# Altium PCB L5_Interface_V2.0.PcbDoc
Units mm, origin at the board's own origin, x right, y up, seen from the top; angles counter-clockwise.
Board outline 96.26 x 58.26 mm, 2 copper layers (Top Layer, Bottom Layer); 50 components, 37 nets, 239 pads, 140 vias.
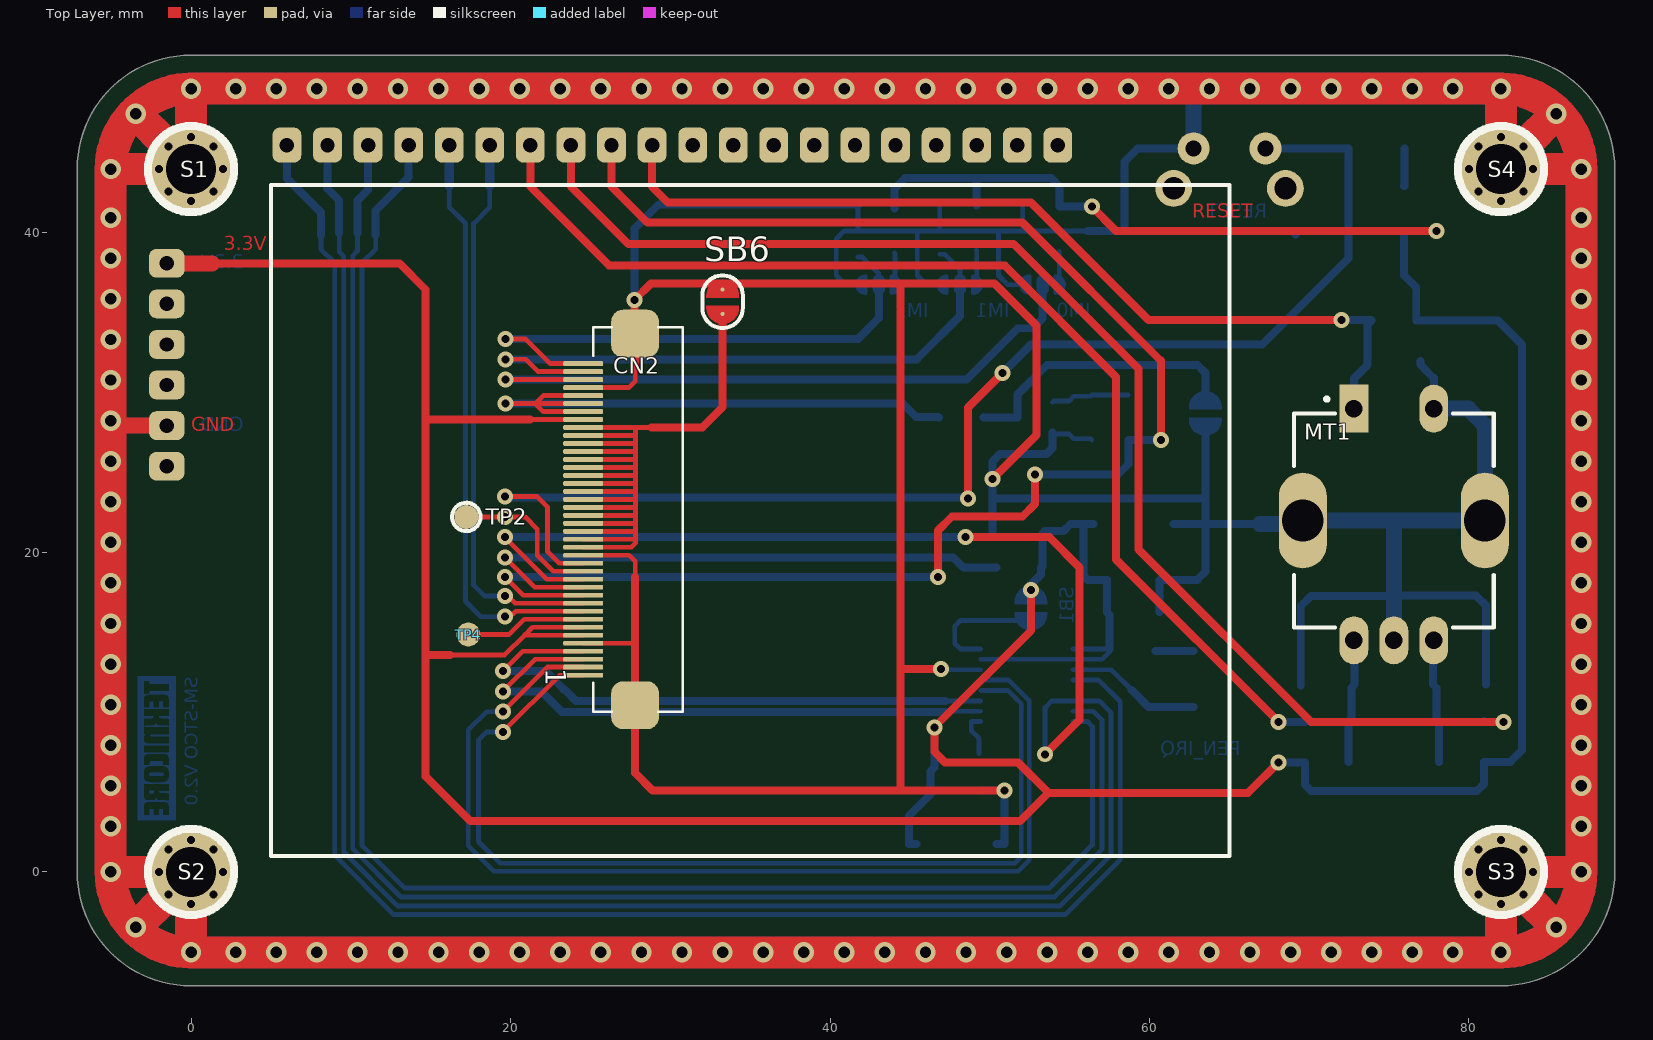
[diagram p0: Top Layer view]
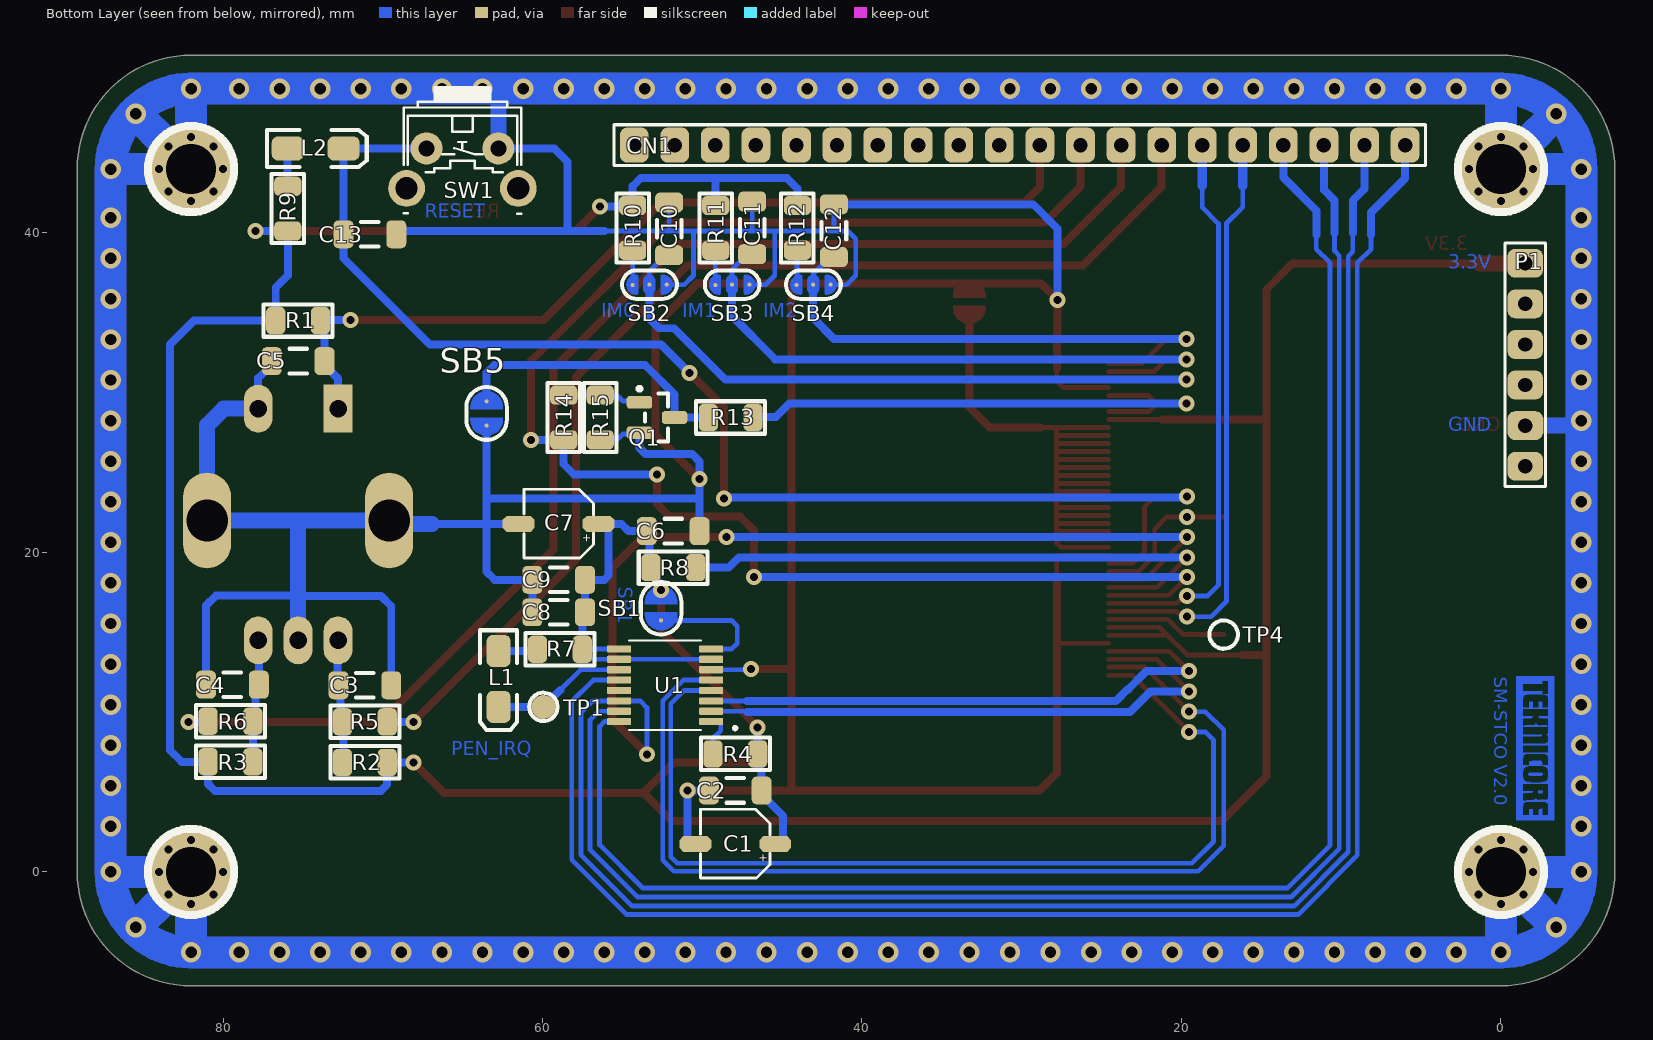
[diagram p1: Bottom Layer view, seen from below]

## Layer stack, top to bottom
Top Solder: solder mask 0.0102, Solder Resist, Dk 3.5
Top Layer: signal copper 0.0356
Dielectric 1: dielectric 0.32, FR-4, Dk 4.8
Bottom Layer: signal copper 0.0356
Bottom Solder: solder mask 0.0102, Solder Resist, Dk 3.5

## Board outline
0,-7.131 cw(c0,0) -7.131,0 -7.131,44 cw(c0,44) 0,51.131 82,51.131 cw(c82,44) 89.131,44 89.131,0 cw(c82,0) 82,-7.131

## Design rules (kind name [scope] priority, off if disabled: settings)
Clearance Clearance_1 [All] p1: gap=0.2 ignorepadtopadclearanceinfootprint=FALSE
Clearance [All] p2: gap=0.2 ignorepadtopadclearanceinfootprint=FALSE
PolygonConnect [All] p1: connectstyle=Relief reliefconductorwidth=0.254 reliefentries=4 polygonreliefangle="90 Angle" airgapwidth=0.254
RoutingVias [All] p1: holewidth=0.711 width=1.27 viastyle="Through Hole" minholewidth=0.5 minwidth=0 maxholewidth=0.711 maxwidth=1.27
SolderMaskExpansion [All] p1: expansion=0.102 istentingtop=FALSE
SupplyNets "Schematic Supply Nets_1" [InNet('+3.3')] p1: voltage=0.000
SupplyNets "Schematic Supply Nets" [InNet('GND')] p2: voltage=0.000
UnConnectedPin [All] p1:
Width [All] p1: maxlimit=5 minlimit=0.2 preferedwidth=0.3
30 further rules are at their usual default settings.

## Components (designator, comment, footprint, x,y, rotation, side; value= is the part's Value field where it differs from the comment)
C1 "10uF/25V" CAP_EL_B 48.273,1.549 r270 bottom
C2 "100nF" CAP1206 47.93,5.105 r180 bottom
C3 "10nF" CAP1206 71.12,11.684 r0 bottom
C4 "10nF" CAP1206 79.413,11.722 r180 bottom
C5 "10nF" CAP1206 75.3,31.979 r180 bottom
C6 "100nF" CAP1206 51.816,21.336 r0 bottom
C7 "10uF/25V" CAP_EL_B 59.33,21.59 r270 bottom
C8 "100nF" CAP1206 58.987,16.256 r180 bottom
C9 "100nF" CAP1206 58.987,18.288 r180 bottom
C10 "100nF" CAP1206 52.07,40.259 r270 bottom
C11 "100nF" CAP1206 46.871,40.321 r270 bottom
C12 "100nF" CAP1206 41.758,40.145 r270 bottom
C13 "100nF" CAP1206 70.806,39.919 r0 bottom
CN1 "Header Male 1x20" "HDR_M_1x20PIN_0.2\"" 30.13,45.5 r0 bottom
CN2 "TFT Display 2.4 inch" "FPC_CONNECTOR HIROSE_FH12A-40S-0.5SH(55)" 26.174,22.067 r270 top
L1 "RED" "LED 1206" 62.749,12.081 r270 bottom
L2 "Red" "LED 1206" 74.203,45.29 r180 bottom
MT1 "PEC11R_Rotary Encoder" "PEC11R_Rotary Encoder" 75.3,22 r0 top
P1 "Header Male 1x6" "HDR_M_1X6PIN_0.2\"" -1.524,38.1 r270 bottom
Q1 "SS8050" SOT23_M 52.832,28.448 r180 bottom
R1 "10K" Resistor_SMD_1206 75.3,34.519 r0 bottom
R2 "10K" Resistor_SMD_1206 71.12,6.858 r180 bottom
R3 "10K" Resistor_SMD_1206 79.537,6.896 r0 bottom
R4 "10R" Resistor_SMD_1206 47.93,7.391 r180 bottom
R5 "0R" Resistor_SMD_1206 71.12,9.398 r0 bottom
R6 "0R" Resistor_SMD_1206 79.537,9.436 r180 bottom
R7 "82R" Resistor_SMD_1206 58.912,13.941 r180 bottom
R8 "10K" Resistor_SMD_1206 51.816,19.05 r0 bottom
R9 "82R" Resistor_SMD_1206 75.946,41.526 r270 bottom
R10 "10K" Resistor_SMD_1206 54.356,40.321 r90 bottom
R11 "10K" Resistor_SMD_1206 49.157,40.321 r90 bottom
R12 "10K" Resistor_SMD_1206 44.044,40.321 r90 bottom
R13 "47R" Resistor_SMD_1206 48.218,28.448 r180 bottom
R14 "1K" Resistor_SMD_1206 58.674,28.448 r270 bottom
R15 "10K" Resistor_SMD_1206 56.388,28.448 r90 bottom
S1 "Screw" "SCREW 3MM-INVIRONS 0.254MM" 0,44 r0 top
S2 "Screw" "SCREW 3MM-INVIRONS 0.254MM" 0,0 r0 top
S3 "Screw" "SCREW 3MM-INVIRONS 0.254MM" 82,0 r0 top
S4 "Screw" "SCREW 3MM-INVIRONS 0.254MM" 82,44 r0 top
SB1 "Solder Bridge" "SolderBridge_NC (100x80)(20)mil"#1 52.578,16.51 r270 bottom
SB2 "Solder Bridge" "SOLDERBRIDGE_SMALL_NC_3PIN (70X50)(20)MIL"#1 53.315,36.765 r0 bottom
SB3 "Solder Bridge" "SOLDERBRIDGE_SMALL_NC_3PIN (70X50)(20)MIL"#2 48.141,36.765 r0 bottom
SB4 "Solder Bridge" "SOLDERBRIDGE_SMALL_NC_3PIN (70X50)(20)MIL"#3 43.053,36.765 r0 bottom
SB5 "Solder Bridge" "SolderBridge_NC (100x80)(20)mil"#1 63.5,28.702 r90 bottom
SB6 "Solder Bridge" "SolderBridge_NC (100x80)(20)mil"#2 33.274,35.698 r270 top
SW1 "Push Button" SW_PushBotton_Right 65.012,45.29 r0 bottom
TP1 "Test Point" TestPoint_SMD_Circle_1.5mm#1 59.944,10.331 r180 bottom
TP2 "Test Point" TestPoint_SMD_Circle_1.5mm#1 17.23,22.225 r0 top
TP4 "Test Point" TestPoint_SMD_Circle_1.5mm#2 17.357,14.859 r180 bottom
U1 "HR2046" TSSOP16 52.324,11.684 r0 bottom

## Footprints (in the part's own frame and the unit in brackets; to place one, negate y for a bottom-side part, rotate by r counter-clockwise, add the part's x,y. Pads: shape width x height; smd on the part's side, far side on the other; paste and mask are expansions set on the pad)
CAP1206 [mm] "Chip Capacitor, 2-Leads, Body 3/20x1/60mm, IPC Medium Density DESIGNER:ABBAS BASEREH"
  rrect50% 1.25x1.75 smd: 1(-1.651,0) 2(1.651,0)
  silkscreen extent -0.55,-0.77 0.55,0.77, body extent -1.65,-0.85 1.65,0.85, height 0.94
CAP_EL_B [mm] "83x83mm"
  oct 1x2 smd: 1(-0.203,2.845) 2(-0.203,-2.159)
  silkscreen extent -2.37,-1.83 1.93,2.51, body extent -2.35,-1.98 1.95,2.62, height 5.4
"FPC_CONNECTOR HIROSE_FH12A-40S-0.5SH(55)" [mm]
  rrect50% 0.3x2.5 smd: 1(9.754,-1.626) 2(9.246,-1.626) 3(8.746,-1.626) 4(8.246,-1.626) 5(7.746,-1.626) 6(7.246,-1.626) 7(6.746,-1.626) 8(6.246,-1.626) 9(5.746,-1.626) 10(5.246,-1.626) 11(4.746,-1.626) 12(4.246,-1.626) 13(3.746,-1.626) 14(3.246,-1.626) 15(2.746,-1.626) 16(2.246,-1.626) 17(1.746,-1.626) 18(1.246,-1.626) 19(0.746,-1.626) 20(0.246,-1.626) 21(-0.254,-1.626) 22(-0.754,-1.626) 23(-1.254,-1.626) 24(-1.754,-1.626) 25(-2.254,-1.626) 26(-2.754,-1.626) 27(-3.254,-1.626) 28(-3.754,-1.626) 29(-4.254,-1.626) 30(-4.754,-1.626) 31(-5.254,-1.626) 32(-5.754,-1.626) 33(-6.254,-1.626) 34(-6.754,-1.626) 35(-7.254,-1.626) 36(-7.754,-1.626) 37(-8.254,-1.626) 38(-8.754,-1.626) 39(-9.254,-1.626) 40(-9.754,-1.626)
  rrect50% 3x3 smd: 41(-11.633,1.626) 42(11.633,1.626)
  silkscreen extent -12.04,-0.99 12.04,4.6, body extent -12.25,-1.75 12.25,5.25, height 2.03
"HDR_M_1X6PIN_0.2\"" [mm] "6 row, straight, gold plating"
  rrect50% 1.8x2.2 hole 0.9: 1(0,0) 2(2.54,0) 3(5.08,0) 4(7.62,0) 5(10.16,0) 6(12.7,0)
  silkscreen extent -1.27,-1.27 13.97,1.27, body extent -1.28,-1.38 13.96,1.54, height 8.61
"HDR_M_1x20PIN_0.2\"" [mm] "2.00 mm THT Pin Header, 20p"
  rrect50% 1.8x2.2 hole 0.9: 1(-24.13,0) 2(-21.59,0) 3(-19.05,0) 4(-16.51,0) 5(-13.97,0) 6(-11.43,0) 7(-8.89,0) 8(-6.35,0) 9(-3.81,0) 10(-1.27,0) 11(1.27,0) 12(3.81,0) 13(6.35,0) 14(8.89,0) 15(11.43,0) 16(13.97,0) 17(16.51,0) 18(19.05,0) 19(21.59,0) 20(24.13,0)
  silkscreen extent -25.4,-1.27 25.4,1.27, body extent -25.39,-1.27 25.4,1.26, height 8.51
"LED 1206" [mm]
  rrect50% 2x1.5 smd: A(-1.75,0) K(1.75,0)
  silkscreen extent -3.05,-1.15 3.2,1.15, body extent -1.65,-0.72 1.65,0.73, height 1.36
"PEC11R_Rotary Encoder" [mm]
  oval 1.8x3 hole 1.1: 1(-2.5,-7.5) 2(0,-7.5) 3(2.5,-7.5) 5(2.5,7)
  rect 1.8x3 hole 1.1: 4(-2.5,7)
  oval 3x6 hole 2.6: S1(-5.7,0) S2(5.7,0)
  silkscreen extent -6.25,-6.7 6.25,7.7, body extent -6.92,-7.6 6.92,7.1, height 21
Resistor_SMD_1206 [mm]
  rrect50% 1.2x1.7 smd: 1(-1.4,0) 2(1.4,0)
  silkscreen extent -2.16,-1.02 2.16,1.02, body extent -1.52,-0.76 1.52,0.76, height 0.6
"SCREW 3MM-INVIRONS 0.254MM" [mm]
  round 0.5 hole 0.5: S(-2,0) S(-1.414,-1.414) S(-1.414,1.414) S(0,-2) S(0,2) S(1.414,-1.414) S(1.414,1.414) S(2,0)
  round 5 hole 3.15 mask+0.1: S(0,0)
  silkscreen extent -2.7,-2.7 2.7,2.7, body extent -2.8,-2.8 2.8,2.8, height 2.58
"SolderBridge_NC (100x80)(20)mil"#1 [mil]
  round 10 smd: 1(-30,0) 2(30,0)
  round 81 on Bottom Solder mask+0: 5(-15,0) 6(15,0)
  Top Layer region: 10,-40 15,-40 30.31,-36.96 43.28,-28.28 51.96,-15.31 55,0 55,0 51.96,15.31 43.28,28.28 30.31,36.96 15,40 15,40 10,40
  Top Layer region: -10,40 -15,40 -30.31,36.96 -43.28,28.28 -51.96,15.31 -55,0 -55,0 -51.96,-15.31 -43.28,-28.28 -30.31,-36.96 -15,-40 -15,-40 -10,-40
  silkscreen extent -65,-50 65,50
"SolderBridge_NC (100x80)(20)mil"#2 [mil]
  round 10 smd: 1(-30,0) 2(30,0)
  round 81 on Top Solder mask+0: 5(-15,0) 6(15,0)
  Top Layer region: -10,40 -15,40 -30.31,36.96 -43.28,28.28 -51.96,15.31 -55,0 -55,0 -51.96,-15.31 -43.28,-28.28 -30.31,-36.96 -15,-40 -15,-40 -10,-40
  Top Layer region: 10,-40 15,-40 30.31,-36.96 43.28,-28.28 51.96,-15.31 55,0 55,0 51.96,15.31 43.28,28.28 30.31,36.96 15,40 15,40 10,40
  silkscreen extent -65,-50 65,50
"SOLDERBRIDGE_SMALL_NC_3PIN (70X50)(20)MIL"#1 [mil]
  round 10 smd mask+0: 1(-43,0) 2(0,0) 3(41,1)
  round 51 on Bottom Solder mask+0: 3(-33,0) 4(0,0) 4(32,0)
  Top Layer region: 32,20 39.65,18.48 46.14,14.14 50.48,7.65 52,0 52,0 50.48,-7.65 46.14,-14.14 39.65,-18.48 32,-20 32,-20
  Top Layer region: -33,20 -40.65,18.48 -47.14,14.14 -51.48,7.65 -53,0 -53,0 -51.48,-7.65 -47.14,-14.14 -40.65,-18.48 -33,-20 -33,-20
  Top Layer region: -10.02,20.08 -2.37,18.56 4.12,14.22 8.45,7.74 9.98,0.08 9.98,0.08 8.45,-7.57 4.12,-14.06 -2.37,-18.4 -10.02,-19.92 -10.02,-19.92
  Top Layer lines w10: -53,0 cw(c-33,0) -52.78,2.96 cw(c-33,0) -33,20 -33,0 -33,-20 cw(c-33,0) -53,0 ; -10.02,10.16 cw(c0,10.16) 0,20.19 cw(c0,10.16) 10.02,10.16 10.02,0 10.02,-10 cw(c0,-10) 0,-20.02 cw(c0,-10) -10.02,-10 -10.02,0 -10.02,10.16 ; 32,20 cw(c32,0) 41,-17.86 cw(c32,0) 32,-20 32,1 32,20
  silkscreen extent -68,-35 67,35
"SOLDERBRIDGE_SMALL_NC_3PIN (70X50)(20)MIL"#2 [mil]
  round 10 smd mask+0: 1(-43,0) 2(0,0) 3(41,1)
  round 51 on Bottom Solder mask+0: 3(-33,0) 4(0,0) 4(32,0)
  Top Layer region: 32,20 39.65,18.48 46.14,14.14 50.48,7.65 52,0 52,0 50.48,-7.65 46.14,-14.14 39.65,-18.48 32,-20 32,-20
  Top Layer region: -33,20 -40.65,18.48 -47.14,14.14 -51.48,7.65 -53,0 -53,0 -51.48,-7.65 -47.14,-14.14 -40.65,-18.48 -33,-20 -33,-20
  Top Layer region: -10.02,20.08 -2.37,18.56 4.12,14.22 8.45,7.74 9.98,0.08 9.98,0.08 8.45,-7.57 4.12,-14.06 -2.37,-18.4 -10.02,-19.92 -10.02,-19.92
  Top Layer lines w10: -53,0 cw(c-33,0) -33,20 -33,0 -33,-20 cw(c-33,0) -53,0 ; -10.02,10.16 cw(c0,10.16) 0,20.19 cw(c0,10.16) 10.02,10.16 10.02,0 10.02,-10 cw(c0,-10) 0,-20.02 cw(c0,-10) -10.02,-10 -10.02,0 -10.02,10.16 ; 32,20 cw(c32,0) 41,-17.86 cw(c32,0) 32,-20 32,1 32,20
  silkscreen extent -68,-35 67,35
"SOLDERBRIDGE_SMALL_NC_3PIN (70X50)(20)MIL"#3 [mil]
  round 10 smd mask+0: 1(-43,0) 2(0,0) 3(41,1)
  round 51 on Bottom Solder mask+0: 3(-33,0) 4(0,0) 4(32,0)
  Top Layer region: 32,20 39.65,18.48 46.14,14.14 50.48,7.65 52,0 52,0 50.48,-7.65 46.14,-14.14 39.65,-18.48 32,-20 32,-20
  Top Layer region: -33,20 -40.65,18.48 -47.14,14.14 -51.48,7.65 -53,0 -53,0 -51.48,-7.65 -47.14,-14.14 -40.65,-18.48 -33,-20 -33,-20
  Top Layer region: -10.02,20.08 -2.37,18.56 4.12,14.22 8.45,7.74 9.98,0.08 9.98,0.08 8.45,-7.57 4.12,-14.06 -2.37,-18.4 -10.02,-19.92 -10.02,-19.92
  Top Layer lines w10: -53,0 ccw(c-33,0) -52.84,-2.54 ccw(c-33,0) -33,-20 -33,0 -33,20 ccw(c-33,0) -53,0 ; -10.02,10.16 cw(c0,10.16) -1,20.14 cw(c0,10.16) 0,20.19 cw(c0,10.16) 10.02,10.16 10.02,0 10.02,-10 cw(c0,-10) 0,-20.02 cw(c0,-10) -1,-19.97 cw(c0,-10) -10.02,-10 -10.02,0 -10.02,10.16 ; 32,20 cw(c32,0) 41,-17.86 cw(c32,0) 32,-20 32,1 32,20
  silkscreen extent -68,-35 67,35
SOT23_M [mm] "SOT23, 3-Leads, Body 2.9x1.3mm, Pitch 0.95mm, Lead Span 2.3mm, IPC Low Density"
  rrect50% 1.6x0.8 smd: 1(-1.1,0.95) 2(-1.1,-0.95) 3(1.1,0)
  silkscreen extent -1.23,-1.5 0.7,1.92, body extent -1.27,-1.5 1.27,1.5, height 1.1
SW_PushBotton_Right [mm] "Horizontal 6.0mm Square Type (Snap-in) SKHH Series; Stem length 3.85 mm ; 1,000,000 cycles ; 0.98N Force"
  round 2 hole 1.016: 1(-2.25,0) 2(2.25,0)
  round 2.3 hole 1.397: MH(-3.5,2.5) MH(3.5,2.5)
  silkscreen extent -3.68,-3.85 3.68,4.09, body extent -4.25,-3.86 4.25,4.04, height 7.43
TestPoint_SMD_Circle_1.5mm#1 [mm]
  round 1.5 smd: 1(0,0)
  silkscreen extent -0.89,-0.89 0.89,0.89
TestPoint_SMD_Circle_1.5mm#2 [mm]
  round 1.5 smd far side: 1(0,0)
  silkscreen extent -0.89,-0.89 0.89,0.89
TSSOP16 [mm]
  rrect25% 1.5x0.45 smd: 1(-2.885,2.275) 2(-2.885,1.625) 3(-2.885,0.975) 4(-2.885,0.325) 5(-2.885,-0.325) 6(-2.885,-0.975) 7(-2.885,-1.625) 8(-2.885,-2.275) 9(2.885,-2.275) 10(2.885,-1.625) 11(2.885,-0.975) 12(2.885,-0.325) 13(2.885,0.325) 14(2.885,0.975) 15(2.885,1.625) 16(2.885,2.275)
  silkscreen extent -4.48,-2.8 2.25,2.8, body extent -3.2,-2.5 3.2,2.5, height 1.1

## Part data
C1 C7: library part "Capacitor Electorolytic", "Capacitor Electorolytic"
C2 C3 C4 C5 C6 C8 C9 C10 C11 C12 C13: library part "Capacitor Poliester & Ceramic", "Capacitor Poliester & Ceramic"
CN2: "TFT Display 2.4 inch SPI TFT LCD color screen ILI9341 driver"
L1 L2: library part LED, "LED"
MT1: "Incremental Encoder, 12 Mm, Contact Rating 10 Ma - 5 Vdc", Package=None, Availability=Unavailable, MP=PEC11R-4215F-S0024, Price=None
Q1: "SS8050-G (NPN)"
R1 R2 R3 R4 R5 R6 R7 R8 R9 R10 R11 R12 R13 R14 R15: library part Resistor, "Resistor"
SB1 SB5 SB6: library part "Solder Bridge Short (NC)", "Solder Bridge Jumper"
SB2 SB3 SB4: library part "Solder Bridge Short 3Pin (NC)", "Solder Bridge Jumper"
SW1: library part "Push Button 4PIN Right", "Push Button 4PIN Right"
TP1 TP2 TP4: library part TestPoint
U1: library part XPT2046, "driver IC XPT2046 touch screen controller components"

## Free pads (board coordinates)
  round 1.5 on Mech1: 28(0,44) 29(0,0) 30(82,0) 31(82,44) 32(-1.524,38.1) 32(-1.524,38.1) 32(1.27,38.1) 32(1.27,38.1) 32(6.02,42.697) 32(6.02,42.697) 33(6,45.5) 33(6,45.5)

## Via types
v1: diameter 1.27, hole 0.711, Top Layer to Bottom Layer, 106 vias
v2: diameter 1, hole 0.5, Top Layer to Bottom Layer, 34 vias

## Nets (pads, with @x,y where several pads share a name; then routed paths per layer and width w, separated by ;. In a path a pad name is that pad's centre, name@x,y a point inside that pad or via, vN(x,y) a via of type N, cw(c..) or ccw(c..) an arc to the next point about the centre after c; other vN are vias at no path point)
+3.3: C1.1 C2.2 C6.2 C7.1 C8.2 C9.2 CN2.6 CN2.7 CN2.33 P1.1 R1.2 R2.2 R3.2 R4.2 R7.2 R8.2 R9.2 R10.2 R11.2 R12.2 SB1.1 U1.7 U1.9 U1.10 | length 282.3
  Top Layer w0.3: 16.214,13.589 19.643,13.589 20.913,14.859 ; 21.209,28.32 CN2.33 ; CN2.6 20.952,14.82 20.913,14.859 ; CN2.7 21.374,15.32 20.913,14.859
  Top Layer w0.5: 1.304,38.1 13.039,38.1 14.69,36.449 14.69,28.448 ; 16.214,13.589 14.69,13.589 ; 21.209,28.32 14.818,28.32 14.69,28.448 ; v2(52.578,17.653) 52.578,15.099 v2(46.53,9.051) 46.53,7.53 47.202,6.858 51.774,6.858 53.679,4.953 ; v2(56.388,41.656) 57.912,40.132 v2(77.978,40.132) ; v2(68.072,6.858) 66.167,4.953 53.679,4.953 ; 14.69,13.589 14.69,5.969 17.484,3.175 51.901,3.175 53.679,4.953 ; 14.69,13.589 14.69,28.448
  Top Layer w1: P1.1 1.304,38.1
  Bottom Layer w0.3: U1.7 U1.10 57.049,13.309 57.512,13.773 R7.2 ; U1.9 R7.2@57.257,13.959
  Bottom Layer w0.5: R12.2@44.044,41.545 R12.2 44.044,42.774 44.704,43.434 49.022,43.434 ; C1.1 44.933,1.753 44.933,3.509 46.279,4.855 C2.2 46.279,6.29 46.53,6.541 R4.2 v2(46.53,9.051) ; R11.2 49.157,43.299 49.022,43.434 ; v2(52.578,17.653) 52.578,17.988 53.216,18.626 R8.2 ; R8.2@53.296,19.13 53.296,21.165 C6.2 54.61,21.336 55.067,21.793 55.626,21.793 C7.1@55.88,21.793 ; v2(56.388,41.656) 56.385,41.659 54.356,41.659 R10.2 54.356,42.926 53.848,43.434 49.022,43.434 ; C7.1 C7.1@55.88,21.793 ; R7.2@57.496,13.941 57.496,16.097 C8.2 C9.2 56.134,18.288 55.88,18.542 C7.1@55.88,21.793 ; v2(68.072,6.858) R2.2 69.72,5.464 70.104,5.08 80.518,5.08 80.937,5.499 R3.2 82.588,6.896 83.312,7.62 83.312,33.02 81.813,34.519 R1.2 76.7,36.584 75.946,37.338 R9.2 77.972,40.126 v2(77.978,40.132)
BL_CTR: CN1.9 CN2.11 R14.2 | length 100.1
  Top Layer w0.3: v2(19.643,18.472) 20.795,17.32 CN2.11
  Top Layer w0.5: CN1.9 26.32,42.895 28.562,40.653 52.057,40.653 60.706,32.004 v2(60.706,27.051) ; v2(46.764,18.472) 46.764,21.375 47.625,22.236 52.039,22.236 52.832,23.029 v2(52.832,24.892)
  Bottom Layer w0.5: v2(19.643,18.472) v2(46.764,18.472) ; v2(52.832,24.892) 58.039,24.892 58.674,25.527 R14.2 58.677,27.051 v2(60.706,27.051)
GND: C1.2 C2.1 C3.1 C4.1 C5.1 C6.1 C7.2 C8.1 C9.1 C10.1 C11.1 C12.1 C13.1 CN2.5 CN2.16 CN2.37 CN2.41 CN2.42 MT1.2 MT1.5 MT1.S1 MT1.S2 P1.5 Q1.2 R15.1 S1.S S2.S S3.S S4.S SB2.1 SB3.1 SB4.1 SB5.1 SB6.1 SW1.1 U1.6 | length 1044
  Top Layer w0.3: CN2.5 27.767,14.32 ; CN2.16 27.432,19.82 27.8,19.452 27.8,18.472 ; CN2.37 27.389,30.32 27.8,30.732 27.8,31.52
  Top Layer w0.5: 27.8,18.472 CN2.42 27.8,6.194 28.889,5.105 44.408,5.105 ; 27.8,31.52 CN2.41 27.771,33.729 v2(27.771,35.814) 28.798,36.841 44.368,36.841 ; v2(46.948,12.7) 44.419,12.7 44.408,12.711 ; v2(50.165,24.594) 52.917,27.346 52.917,34.216 50.292,36.841 44.368,36.841 ; v2(50.927,5.105) 44.408,5.105 ; 44.368,36.841 44.408,36.801 44.408,12.711 ; 44.408,5.105 44.408,12.711
  Top Layer w1: v1@-5.033,27.9 -4.993,27.94 P1.5 ; 62.762,49.033 62.762,49.5
  Top Layer w2: v1(-3.461,-3.461) -1.414,-1.414 S2.S@0,0 ; v1(-3.461,47.461) -1.414,45.414 S1.S@0,44 ; v1(85.461,-3.461) 83.414,-1.414 S3.S@82,0 ; v1(85.461,47.461) 83.414,45.414 S4.S@82,44 ; v1(-5.033,0) ccw(c0,0) v1(0,-5.033) ; v1(-5.033,0) -2,0 S2.S@0,0 ; v1(-5.033,0) v1(-5.033,2.852) v1(-5.033,5.392) v1(-5.033,7.932) v1(-5.033,10.472) v1(-5.033,13.012) v1(-5.033,15.552) v1(-5.033,18.092) v1(-5.033,20.632) v1(-5.033,23.172) v1(-5.033,25.712) -5.033,27.9 v1(-5.033,28.252) v1(-5.033,30.792) v1(-5.033,33.332) v1(-5.033,35.872) v1(-5.033,38.412) v1(-5.033,40.952) v1(-5.033,44) ; v1(-5.033,44) cw(c0,44) v1(0,49.033) ; v1(-5.033,44) cw(c0,44) v1(0,49.033) ; v1(-5.033,44) -2,44 S1.S@0,44 ; v1(0,-5.033) v1(2.794,-5.033) v1(5.334,-5.033) v1(7.874,-5.033) v1(10.414,-5.033) v1(12.954,-5.033) v1(15.494,-5.033) v1(18.034,-5.033) v1(20.574,-5.033) v1(23.114,-5.033) v1(25.654,-5.033) v1(28.194,-5.033) v1(30.734,-5.033) v1(33.274,-5.033) v1(35.814,-5.033) v1(38.354,-5.033) v1(40.894,-5.033) v1(43.434,-5.033) v1(45.974,-5.033) v1(48.514,-5.033) v1(51.054,-5.033) v1(53.594,-5.033) v1(56.134,-5.033) v1(58.674,-5.033) v1(61.214,-5.033) v1(63.754,-5.033) v1(66.294,-5.033) v1(68.834,-5.033) v1(71.374,-5.033) v1(73.914,-5.033) v1(76.454,-5.033) v1(78.994,-5.033) v1(82,-5.033) ; v1(0,-5.033) 0,-2 S2.S@0,0 ; S1.S@0,44 0,46 v1(0,49.033) ; v1(0,49.033) v1(2.794,49.033) v1(5.334,49.033) v1(7.874,49.033) v1(10.414,49.033) v1(12.954,49.033) v1(15.494,49.033) v1(18.034,49.033) v1(20.574,49.033) v1(23.114,49.033) v1(25.654,49.033) v1(28.194,49.033) v1(30.734,49.033) v1(33.274,49.033) v1(35.814,49.033) v1(38.354,49.033) v1(40.894,49.033) v1(43.434,49.033) v1(45.974,49.033) v1(48.514,49.033) v1(51.054,49.033) v1(53.594,49.033) v1(56.134,49.033) v1(58.674,49.033) v1(61.214,49.033) 62.762,49.033 v1(63.754,49.033) v1(66.294,49.033) v1(68.834,49.033) v1(71.374,49.033) v1(73.914,49.033) v1(76.454,49.033) v1(78.994,49.033) v1(82,49.033) ; v1(82,-5.033) ccw(c82,0) v1(87.033,0) ; v1(82,-5.033) ccw(c82,0) v1(87.033,0) ; v1(82,-5.033) 82,-2 S3.S@82,0 ; S3.S@82,0 84,0 v1(87.033,0) ; S4.S@82,44 82,46 v1(82,49.033) ; S4.S@82,44 84,44 v1(87.033,44) ; v1(82,49.033) cw(c82,44) v1(87.033,44) ; v1(82,49.033) cw(c82,44) v1(87.033,44) ; v1(87.033,0) v1(87.033,2.852) v1(87.033,5.392) v1(87.033,7.932) v1(87.033,10.472) v1(87.033,13.012) v1(87.033,15.552) v1(87.033,18.092) v1(87.033,20.632) v1(87.033,23.172) v1(87.033,25.712) v1(87.033,28.252) v1(87.033,30.792) v1(87.033,33.332) v1(87.033,35.872) v1(87.033,38.412) v1(87.033,40.952) v1(87.033,44)
  Bottom Layer w0.3: 41.707,36.765 40.959,36.765 40.386,37.338 40.386,39.624 40.894,40.132 41.758,40.132 ; 41.711,36.83 SB4.1@41.939,36.83 ; C12.1 41.758,40.132 ; C11.1 46.871,40.14 46.863,40.132 ; v2@46.989,12.659 U1.6 ; SB3.1 46.795,36.765 46.039,36.765 45.466,37.338 45.466,40.132 ; 51.968,36.765 51.119,36.765 50.546,37.338 50.546,40.132 ; 51.974,36.69 SB2.1@52.222,36.69 ; C10.1 52.07,40.132 ; Q1.2 54.016,27.414 54.967,27.414 55.264,27.117 56.319,27.117 R15.1 ; 56.134,40.132 52.07,40.132 ; 41.758,40.132 45.466,40.132 ; 45.466,40.132 46.863,40.132 ; 46.863,40.132 50.546,40.132 ; 50.546,40.132 52.07,40.132
  Bottom Layer w0.5: v2(27.771,35.814) 27.771,40.284 29.282,41.796 C12.1 ; C2.1 v2(50.927,5.105) 50.927,1.753 C1.2 ; C6.1 50.165,23.368 ; Q1.2 53.932,26.542 53.552,26.162 50.631,26.162 50.165,25.696 v2(50.165,24.594) 50.165,23.368 ; 56.134,40.132 58.42,40.132 ; C8.1 C9.1 62.992,18.288 63.5,18.796 63.5,21.793 ; C7.2 63.5,21.793 ; SW1.1 59.26,45.29 58.42,44.45 58.42,40.132 ; 63.5,22.098 63.5,23.368 ; SB5.1 63.5,23.368 ; 66.929,21.793 63.5,21.793 ; C13.1 68.941,40.132 58.42,40.132 ; C3.1 69.469,16.637 70.104,17.272 75.184,17.272 ; 75.349,17.31 80.429,17.31 81.064,16.675 C4.1 ; C5.1 76.951,31.761 77.8,30.912 MT1.5 ; 50.165,23.368 63.5,23.368
  Bottom Layer w1: v1@-5.033,27.9 -4.993,27.94 P1.5 ; SW1.1 62.762,49.033 ; 66.929,21.793 69.393,21.793 MT1.S1 75.3,22 ; MT1.2 75.3,22 ; MT1.5 79.966,29 81,27.966 MT1.S2 75.3,22
  Bottom Layer w2: v1(-3.461,-3.461) -1.414,-1.414 S2.S@0,0 ; v1(-3.461,47.461) -1.414,45.414 S1.S@0,44 ; v1(85.461,-3.461) 83.414,-1.414 S3.S@82,0 ; v1(85.461,47.461) 83.414,45.414 S4.S@82,44 ; v1(-5.033,44) cw(c0,44) v1(0,49.033) ; v1(-5.033,44) cw(c0,44) v1(0,49.033) ; v1(-5.033,44) v1(-5.033,40.952) v1(-5.033,38.412) v1(-5.033,35.872) v1(-5.033,33.332) v1(-5.033,30.792) v1(-5.033,28.252) -5.033,27.9 v1(-5.033,25.712) v1(-5.033,23.172) v1(-5.033,20.632) v1(-5.033,18.092) v1(-5.033,15.552) v1(-5.033,13.012) v1(-5.033,10.472) v1(-5.033,7.932) v1(-5.033,5.392) v1(-5.033,2.852) v1(-5.033,0) ccw(c0,0) v1(0,-5.033) v1(2.794,-5.033) v1(5.334,-5.033) v1(7.874,-5.033) v1(10.414,-5.033) v1(12.954,-5.033) v1(15.494,-5.033) v1(18.034,-5.033) v1(20.574,-5.033) v1(23.114,-5.033) v1(25.654,-5.033) v1(28.194,-5.033) v1(30.734,-5.033) v1(33.274,-5.033) v1(35.814,-5.033) v1(38.354,-5.033) v1(40.894,-5.033) v1(43.434,-5.033) v1(45.974,-5.033) v1(48.514,-5.033) v1(51.054,-5.033) v1(53.594,-5.033) v1(56.134,-5.033) v1(58.674,-5.033) v1(61.214,-5.033) v1(63.754,-5.033) v1(66.294,-5.033) v1(68.834,-5.033) v1(71.374,-5.033) v1(73.914,-5.033) v1(76.454,-5.033) v1(78.994,-5.033) v1(82,-5.033) ; v1(-5.033,44) -2,44 S1.S@0,44 ; S1.S@0,44 0,46 v1(0,49.033) ; v1(0,49.033) v1(2.794,49.033) v1(5.334,49.033) v1(7.874,49.033) v1(10.414,49.033) v1(12.954,49.033) v1(15.494,49.033) v1(18.034,49.033) v1(20.574,49.033) v1(23.114,49.033) v1(25.654,49.033) v1(28.194,49.033) v1(30.734,49.033) v1(33.274,49.033) v1(35.814,49.033) v1(38.354,49.033) v1(40.894,49.033) v1(43.434,49.033) v1(45.974,49.033) v1(48.514,49.033) v1(51.054,49.033) v1(53.594,49.033) v1(56.134,49.033) v1(58.674,49.033) v1(61.214,49.033) 62.762,49.033 v1(63.754,49.033) v1(66.294,49.033) v1(68.834,49.033) v1(71.374,49.033) v1(73.914,49.033) v1(76.454,49.033) v1(78.994,49.033) v1(82,49.033) ; v1(82,-5.033) ccw(c82,0) v1(87.033,0) ; v1(82,-5.033) ccw(c82,0) v1(87.033,0) ; v1(82,-5.033) 82,-2 S3.S@82,0 ; S3.S@82,0 84,0 v1(87.033,0) ; S4.S@82,44 84,44 v1(87.033,44) ; S4.S@82,44 82,46 v1(82,49.033) ; v1(82,49.033) cw(c82,44) v1(87.033,44) ; v1(82,49.033) cw(c82,44) v1(87.033,44) ; v1(87.033,0) v1(87.033,2.852) v1(87.033,5.392) v1(87.033,7.932) v1(87.033,10.472) v1(87.033,13.012) v1(87.033,15.552) v1(87.033,18.092) v1(87.033,20.632) v1(87.033,23.172) v1(87.033,25.712) v1(87.033,28.252) v1(87.033,30.792) v1(87.033,33.332) v1(87.033,35.872) v1(87.033,38.412) v1(87.033,40.952) v1(87.033,44)
IM0: C10.2 CN2.38 SB2.2 | length 44.7
  Top Layer w0.3: v2(19.684,30.82) CN2.38
  Bottom Layer w0.3: C10.2 52.324,38.608 53.315,37.617 53.315,37.274 53.315,37.019
  Bottom Layer w0.5: v2(19.684,30.82) 48.558,30.82 51.774,34.036 52.705,34.036 53.315,34.646 53.315,37.019
IM1: C11.2 CN2.39 SB3.2 | length 38.8
  Top Layer w0.3: v2(19.684,32.09) 20.954,32.09 21.724,31.32 CN2.39
  Bottom Layer w0.3: C11.2 47.182,38.67 48.141,37.711 48.141,37.274 SB3.2
  Bottom Layer w0.5: v2(19.684,32.09) 45.434,32.09 48.141,34.798 48.141,36.253
IM2: C12.2 CN2.40 SB4.2 | length 33.9
  Top Layer w0.3: v2(19.684,33.36) 20.954,33.36 22.494,31.82 CN2.40
  Bottom Layer w0.3: C12.2 42.024,38.494 43.028,37.49 43.028,37.273 SB4.2@43.028,36.765 ; 43.053,36.253 SB4.2
  Bottom Layer w0.5: v2(19.684,33.36) 41.742,33.36 43.053,34.671 43.053,36.253
"LCD_CSX / SPI CSX": CN1.5 CN2.9 | length 36.9
  Top Layer w0.3: v2@19.68,15.87 19.869,15.87 20.32,16.32 CN2.9
  Bottom Layer w0.3: 16.16,42.957 16.16,41.625 17.179,40.606 17.179,16.942 18.144,15.977 v2(19.642,15.977) v2@19.668,15.977
  Bottom Layer w0.6: 16.16,42.957 CN1.5
"LCD_DCS / SPI SCL": CN1.6 CN2.10 | length 35.3
  Top Layer w0.3: v2(19.642,17.271) 19.831,17.271 20.282,16.82 CN2.10
  Bottom Layer w0.3: 18.7,42.957 18.7,41.602 17.687,40.589 17.687,17.958 18.373,17.272 v2(19.642,17.271) v2(19.642,17.271)
  Bottom Layer w0.6: 18.7,42.957 CN1.6
LCD_RESET: C13.2 CN2.15 L2.K SW1.2 | length 82.8
  Top Layer w0.3: v2(19.643,23.495) 21.675,23.495 22.31,22.86 22.31,20.066 23.056,19.32 CN2.15
  Top Layer w0.5: v2(48.641,23.379) 48.641,29.083 v2(50.8,31.242)
  Bottom Layer w0.5: v2(19.643,23.495) 19.701,23.437 48.583,23.437 v2(48.641,23.379) ; v2(50.8,31.242) 52.578,33.02 67.056,33.02 72.457,38.421 C13.2 72.453,39.923 L2.K ; SW1.2 L2.K@72.452,45.29
"LCD_SPI SDI / SDA": CN1.2 CN2.13 U1.14 | length 167.2
  Top Layer w0.3: v2(19.643,20.955) 22.278,18.32 CN2.13
  Top Layer w0.5: v2(48.472,20.955) 53.732,20.955 55.626,19.061 55.626,9.525 v2(53.467,7.366)
  Bottom Layer w0.3: 9.271,40.005 9.271,38.832 9.554,38.549 9.554,1.248 12.943,-2.141 54.374,-2.141 57.598,1.083 57.598,9.966 56.855,10.709 U1.14 53.889,10.709 53.467,10.287 v2(53.467,7.366)
  Bottom Layer w0.5: CN1.2 8.54,42.768 9.271,42.037 9.271,40.005 ; v2(19.643,20.955) v2(48.472,20.955)
LCD_X+: CN2.3 U1.2 | length 36.3
  Top Layer w0.3: v2(19.516,11.303) 21.533,13.32 CN2.3
  Bottom Layer w0.3: 47.202,10.009 47.252,10.059 U1.2
  Bottom Layer w0.5: v2(19.516,11.303) 21.929,11.303 23.223,10.009 47.202,10.009
LCD_X-: CN2.1 U1.4 | length 61.7
  Top Layer w0.3: v2(19.516,8.763) 23.066,12.313 CN2.1
  Bottom Layer w0.3: v2(19.516,8.763) 18.5,8.763 17.992,8.255 17.992,1.905 19.35,0.547 51.576,0.547 51.968,0.94 51.968,10.516 51.125,11.359 U1.4
LCD_Y+: CN2.4 U1.3 | length 36.2
  Top Layer w0.3: v2(19.516,12.573) 20.763,13.82 CN2.4
  Bottom Layer w0.3: 47.202,10.709 U1.3
  Bottom Layer w0.5: v2(19.516,12.573) 22.183,12.573 23.326,11.43 23.376,11.43 24.097,10.709 47.202,10.709
LCD_Y-: CN2.2 U1.5 | length 65.7
  Top Layer w0.3: v2(19.516,10.033) 22.303,12.82 CN2.2
  Bottom Layer w0.3: v2(19.516,10.033) 18.5,10.033 17.357,8.89 17.357,1.651 18.961,0.047 51.783,0.047 52.468,0.733 52.468,10.727 51.186,12.009 U1.5
NetC3_2: C3.2 MT1.1 R2.1 R5.2 | length 7.8
  Bottom Layer w0.5: R2.1@72.463,6.896 72.463,9.436 72.644,9.617 72.644,11.528 72.838,11.722 72.838,14.462 MT1.1
NetC4_2: C4.2 MT1.3 R3.1 R6.2 | length 7.8
  Bottom Layer w0.5: MT1.3 77.762,14.462 C4.2 77.956,11.528 77.956,9.617 R6.2 R3.1
NetCN2_8: CN2.8 TP4.1 | length 7.6
  Top Layer w0.3: TP4.1 19.897,14.859 20.858,15.82 CN2.8
NetCN2_12: CN2.12 R8.1 | length 36.7
  Top Layer w0.3: v2(19.643,19.685) 21.508,17.82 CN2.12
  Bottom Layer w0.5: v2(19.643,19.685) 47.71,19.685 48.345,19.05 R8.1
NetCN2_14: CN2.14 TP2.1 | length 9.7
  Top Layer w0.3: TP2.1 v2(19.643,22.225) 20.913,22.225 21.675,21.463 21.675,19.812 22.667,18.82 CN2.14
NetCN2_17: CN2.17 CN2.18 CN2.19 CN2.20 CN2.21 CN2.22 CN2.23 CN2.24 CN2.25 CN2.26 CN2.27 CN2.28 CN2.29 CN2.30 CN2.31 CN2.32 SB6.2 | length 71.4
  Top Layer w0.3: CN2.17 27.563,20.32 27.813,20.57 27.813,20.82 ; CN2.18 27.813,20.82 ; CN2.19 27.813,21.32 ; CN2.20 27.813,21.82 ; CN2.21 27.813,22.32 ; CN2.22 27.813,22.82 ; CN2.23 27.813,23.32 ; CN2.24 27.813,23.82 ; CN2.25 27.813,24.32 ; CN2.26 27.813,24.82 ; CN2.27 27.813,25.32 ; CN2.28 27.813,25.82 ; CN2.29 27.813,26.32 ; CN2.30 27.813,26.82 ; CN2.31 27.813,27.32 ; CN2.32 27.813,27.82 ; 28.829,27.82 27.813,27.82 ; 27.813,20.82 27.813,21.32 ; 27.813,21.32 27.813,21.82 ; 27.813,21.82 27.813,22.32 ; 27.813,22.32 27.813,22.82 ; 27.813,22.82 27.813,23.32 ; 27.813,23.32 27.813,23.82 ; 27.813,23.82 27.813,24.32 ; 27.813,24.32 27.813,24.82 ; 27.813,24.82 27.813,25.32 ; 27.813,25.32 27.813,25.82 ; 27.813,25.82 27.813,26.32 ; 27.813,26.32 27.813,26.82 ; 27.813,26.82 27.813,27.32 ; 27.813,27.32 27.813,27.82
  Top Layer w0.5: 28.829,27.82 32.004,27.82 33.274,29.09 SB6.2
NetCN2_34: CN2.34 CN2.35 CN2.36 R13.2 | length 38.8
  Top Layer w0.3: v2@19.66,29.32 21.548,29.32 ; CN2.34 22.048,28.82 21.548,29.32 ; CN2.35 21.548,29.32 ; CN2.36 22.048,29.82 21.548,29.32
  Bottom Layer w0.5: v2(19.684,29.337) 44.535,29.337 45.38,28.492 46.774,28.492 R13.2
NetL1_A: L1.A R7.1 | length 2.4
  Bottom Layer w0.5: R7.1@60.387,13.829 60.987,13.829 60.99,13.831 L1.A
NetL2_A: L2.A R9.1 | length 2.4
  Bottom Layer w0.5: R9.1 75.953,42.933 L2.A
NetQ1_1: Q1.1 R14.1 R15.2 | length 4.9
  Bottom Layer w0.3: Q1.1 54.016,29.482 54.967,29.482 55.264,29.779 56.319,29.779 R15.2 R14.1
NetQ1_3: Q1.3 R13.1 SB5.2 | length 18.1
  Bottom Layer w0.5: R13.1 Q1.3 51.732,29.888 53.594,31.75 62.992,31.75 63.5,31.242 SB5.2@63.5,29.472
NetR4_1: R4.1 U1.1 | length 2.8
  Bottom Layer w0.3: R4.1 49.33,8.363 48.844,8.848 48.844,9.409 U1.1
NetR10_1: R10.1 SB2.3@54.356,36.74 | length 2.2
  Bottom Layer w0.3: SB2.3@54.356,36.665 54.356,37.144 R10.1@54.356,38.859
NetR11_1: R11.1 SB3.3@49.183,36.74 | length 2.2
  Bottom Layer w0.3: R11.1 49.183,38.896 49.183,37.219 SB3.3@49.183,36.74
NetR12_1: R12.1 SB4.3@44.094,36.74 | length 2.2
  Bottom Layer w0.3: R12.1@44.044,38.745 44.069,38.719 44.069,37.042 44.069,36.563
NetSB1_2: SB1.2 U1.8 | length 7.8
  Bottom Layer w0.3: U1.8 48.153,13.959 47.812,14.3 47.812,15.392 48.167,15.748 SB1.2
ROT_CLK: CN1.7 R5.1 | length 71.7
  Top Layer w0.5: CN1.7 21.24,42.895 26.176,37.959 50.941,37.959 57.912,30.988 57.912,19.558 v2(68.072,9.398)
  Bottom Layer w0.5: v2(68.072,9.398) R5.1
ROT_DT: CN1.8 R6.1 | length 82.7
  Top Layer w0.5: CN1.8 23.78,42.895 27.369,39.306 51.499,39.306 59.309,31.496 59.309,20.193 70.104,9.398 v2(82.169,9.398)
  Bottom Layer w0.5: R6.1 80.975,9.398 v2(82.169,9.398)
ROT_SW: C5.2 CN1.10 MT1.4 R1.1 | length 57.1
  Top Layer w0.5: CN1.10 28.86,42.895 29.845,41.91 52.578,41.91 59.944,34.544 v2(72.009,34.544)
  Bottom Layer w0.5: v2(72.009,34.544) 73.875,34.544 R1.1 73.649,34.268 C5.2 73.649,31.739 72.8,30.89 MT1.4
T_CLK: CN1.4 U1.16 | length 101.8
  Bottom Layer w0.3: 11.557,39.878 11.557,39.243 11.557,38.989 10.697,38.129 10.697,1.664 13.359,-0.998 53.739,-0.998 56.43,1.693 56.43,9.102 56.123,9.409 U1.16
  Bottom Layer w0.5: 11.557,39.878 11.557,41.402 13.62,43.465 CN1.4
T_CS: CN1.3 U1.15 | length 104
  Bottom Layer w0.3: 10.414,40.005 10.414,38.876 10.117,38.579 10.117,1.446 13.141,-1.578 54.048,-1.578 57.024,1.398 57.024,9.519 56.484,10.059 U1.15
  Bottom Layer w0.5: 10.414,40.005 10.414,42.037 11.08,42.703 CN1.3
T_DO: CN1.1 U1.12 | length 111.2
  Bottom Layer w0.3: 8.128,39.878 8.128,38.989 8.995,38.122 8.995,1.038 12.7,-2.667 54.737,-2.667 58.166,0.762 58.166,10.668 56.825,12.009 U1.12
  Bottom Layer w0.5: CN1.1 6,43.403 8.128,41.275 8.128,39.878
T_IRQ: L1.K TP1.1 U1.11 | length 8.5
  Bottom Layer w0.3: U1.11 57.616,12.659 58.887,11.389
  Bottom Layer w0.5: 58.887,11.389 TP1.1 L1.K
pads on no net: CN1.11 CN1.12 CN1.13 CN1.14 CN1.15 CN1.16 CN1.17 CN1.18 CN1.19 CN1.20 P1.2 P1.3 P1.4 P1.6 SB1.5 SB1.6 SB2.3@52.476,36.765 SB2.4 SB3.3@47.303,36.765 SB3.4 SB4.3@42.215,36.765 SB4.4 SB5.5 SB5.6 SB6.5 SB6.6 SW1.MH U1.13
copper on no net: | length 10.1
  Bottom Layer w2: -5.033,0 0,0 0,-5.033

## Other copper
Top Layer:
  text "RESET" at 62.674,40.625 h1.5
  text "3.3V" at 2.044,38.593 h1.5
  text "GND" at 0.024,27.29 h1.5
Bottom Layer:
  region: -2.502,5.085 -2.34,5.085 -2.34,4.989 -2.346,4.989 -2.346,4.965 -2.352,4.965 -2.352,4.953 -2.358,4.953 -2.358,4.941 -2.364,4.941 -2.364,4.935 -2.376,4.935 -2.376,4.929 -2.382,4.929 -2.382,4.923 -2.406,4.923 -2.406,4.917 -2.466,4.917 -2.466,4.911 -2.472,4.911 -2.472,4.917 -2.532,4.917 -2.532,4.923 -2.55,4.923 -2.55,4.929 -2.562,4.929 -2.562,4.935 -2.574,4.935 -2.574,4.941 -2.58,4.941 -2.58,4.947 -2.586,4.947 -2.586,4.959 -2.592,4.959 -2.592,4.971 -2.598,4.971 -2.598,4.995 -2.605,4.995 -2.605,5.085 -2.508,5.085
  region: -1.793,6.041 -1.805,6.041 -1.805,6.035 -2.538,6.035 -2.538,6.041 -2.562,6.041 -2.562,6.047 -2.574,6.047 -2.574,6.053 -2.586,6.053 -2.586,6.059 -2.592,6.059 -2.592,6.065 -2.598,6.065 -2.598,6.071 -2.605,6.071 -2.605,6.077 -2.611,6.077 -2.611,6.089 -2.617,6.089 -2.617,6.101 -2.623,6.101 -2.623,6.137 -2.617,6.137 -2.617,6.149 -2.611,6.149 -2.611,6.161 -2.605,6.161 -2.605,6.173 -2.598,6.173 -2.598,6.179 -2.586,6.179 -2.586,6.185 -2.58,6.185 -2.58,6.191 -2.568,6.191 -2.568,6.197 -2.55,6.197 -2.55,6.203 -2.508,6.203 -2.508,6.209 -1.835,6.209 -1.835,6.203 -1.793,6.203 -1.793,6.197 -1.775,6.197 -1.775,6.191 -1.769,6.191 -1.769,6.185 -1.757,6.185 -1.757,6.179 -1.751,6.179 -1.751,6.173 -1.745,6.173 -1.745,6.167 -1.739,6.167 -1.739,6.161 -1.733,6.161 -1.733,6.149 -1.727,6.149 -1.727,6.095 -1.733,6.095 -1.733,6.083 -1.739,6.083 -1.739,6.071 -1.745,6.071 -1.745,6.065 -1.751,6.065 -1.751,6.059 -1.757,6.059 -1.757,6.053 -1.769,6.053 -1.769,6.047 -1.781,6.047 -1.781,6.041 -1.787,6.041
  region: 5 vertices and 9 holes, not listed, extent -3.35,3.221 -0.945,12.241
  text "RESET" at 67.374,40.625 h1.5
  text "3.3V" at 3.302,37.45 h1.5
  text "IM2" at 46.166,34.402 h1.5
  text "IM1" at 51.246,34.402 h1.5
  text "IM0" at 56.326,34.402 h1.5
  text "GND" at 3.302,27.29 h1.5
  text "SB1" at 55.564,17.86 h1.5 r90
  text "SM-STCO V2.0" at 0.684,12.228 h1.4 r90
  text "PEN_IRQ" at 65.711,6.997 h1.5

## Silkscreen, mask and mechanical layers (free items; w line width, h text height)
Top Overlay:
  lines w0.254: 5,1 5,43 65,43 65,1 5,1
Top Solder:
  lines w2: -5.033,44 cw(c0,44) 0,49.033 ; -5.033,44 cw(c0,44) 0,49.033 ; -5.033,44 -5.033,27.9 -5.033,0 ccw(c0,0) 0,-5.033 82,-5.033 ; 0,49.033 82,49.033 ; 82,-5.033 ccw(c82,0) 87.033,0 ; 82,-5.033 ccw(c82,0) 87.033,0 ; 82,49.033 cw(c82,44) 87.033,44 ; 82,49.033 cw(c82,44) 87.033,44 ; 87.033,0 87.033,44
Bottom Solder:
  lines w2: -5.033,44 cw(c0,44) 0,49.033 ; -5.033,44 cw(c0,44) 0,49.033 ; -5.033,44 -5.033,27.9 -5.033,0 ccw(c0,0) 0,-5.033 82,-5.033 ; 0,49.033 82,49.033 ; 82,-5.033 ccw(c82,0) 87.033,0 ; 82,-5.033 ccw(c82,0) 87.033,0 ; 82,49.033 cw(c82,44) 87.033,44 ; 82,49.033 cw(c82,44) 87.033,44 ; 87.033,0 87.033,44
Mechanical 1:
  lines w0.254: -11.867,-5.045 -11.2,-7.045 ; -11.867,48.962 -11.2,50.962 ; -11.454,-7.045 -10.946,-7.045 ; -11.454,-7.004 0,-7.004 ; -11.454,50.962 -10.946,50.962 ; -11.454,51.004 0,51.004 ; -11.2,11.2 -11.2,-7.045 ; -11.2,32.718 -11.2,50.962 ; -10.533,-5.045 -11.2,-7.045 ; -10.533,48.962 -11.2,50.962 ; -7.045,-9.654 -7.045,-9.146 ; -7.004,-9.654 -7.004,0 ; -5.045,-10.067 -7.045,-9.4 ; -5.045,-8.733 -7.045,-9.4 ; 30.2,-9.4 -7.045,-9.4 ; 51.718,-9.4 88.962,-9.4 ; 86.962,-10.067 88.962,-9.4 ; 86.962,-8.733 88.962,-9.4 ; 88.962,-9.654 88.962,-9.146 ; 89.004,-9.654 89.004,0 ; -7.004,0 ccw(c0,0) 0,-7.004 ; -7.004,0 -7.004,44 cw(c0,44) 0,51.004 ; 0,-7.004 82,-7.004 ccw(c82,0) 89.004,0 ; 0,51.004 82,51.004 cw(c82,44) 89.004,44 89.004,0
  text "58.007 (mm)" at -9.692,11.454 h2 r90
  text "96.007 (mm)" at 30.454,-10.908 h2

## Text inside footprints (layer, text, board x,y; h text height)
C1: Bottom Overlay "+" at 46.393,1.168 h0.52 r90; Mechanical 15 "8.3x8.3mm" at 50.051,3.81 h0.15 r90
C7: Bottom Overlay "+" at 57.451,21.209 h0.52 r90; Mechanical 15 "8.3x8.3mm" at 61.108,23.851 h0.15 r90
CN2: Top Overlay "1" at 22.213,12.762 h1.27 r270; Mechanical 13 "1" at 22.161,12.794 h1.27 r270